# Altium PCB balance_car.PcbDoc (part 1 of 4)
Units mil, origin at the board's own origin, x right, y up, seen from the top; angles counter-clockwise.
Board outline 5041 x 1892 mil, 2 copper layers (Top Layer, Bottom Layer); 151 components, 112 nets, 599 pads, 108 vias.
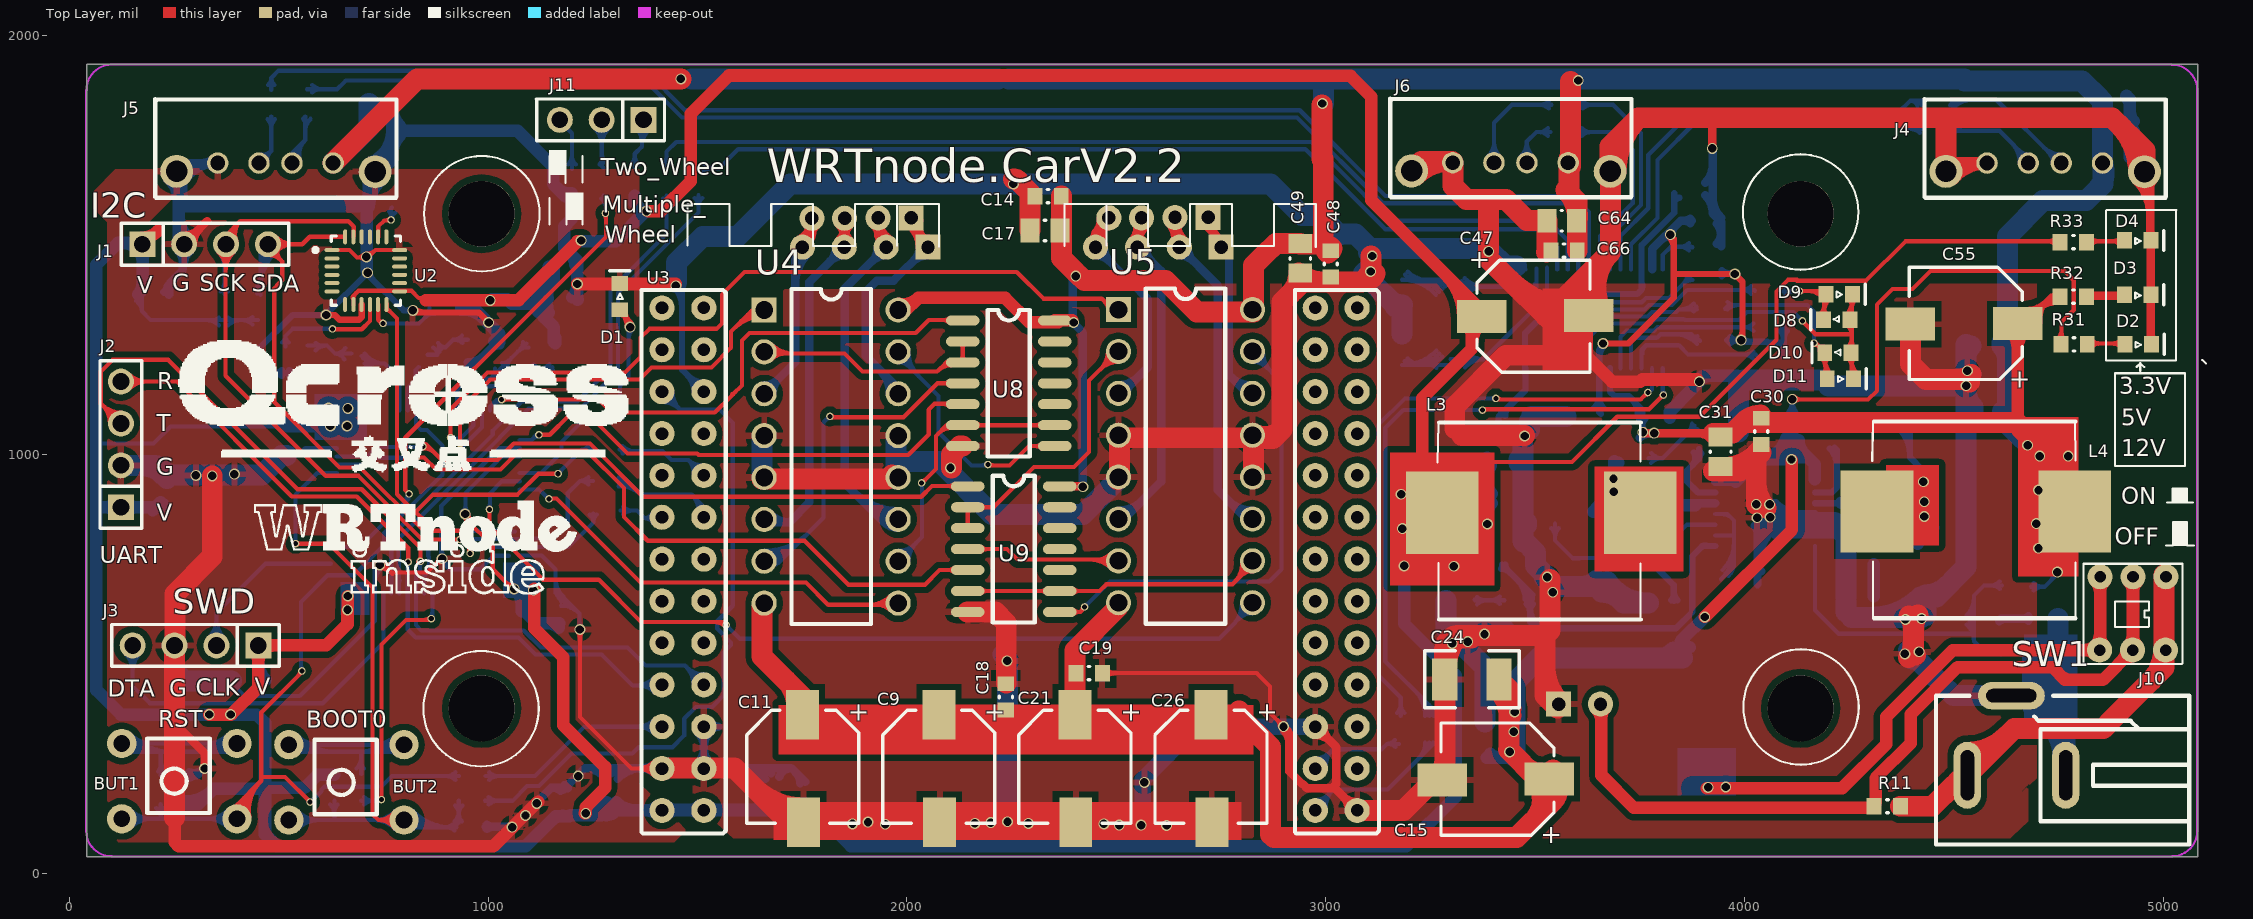
[diagram p0: Top Layer view]
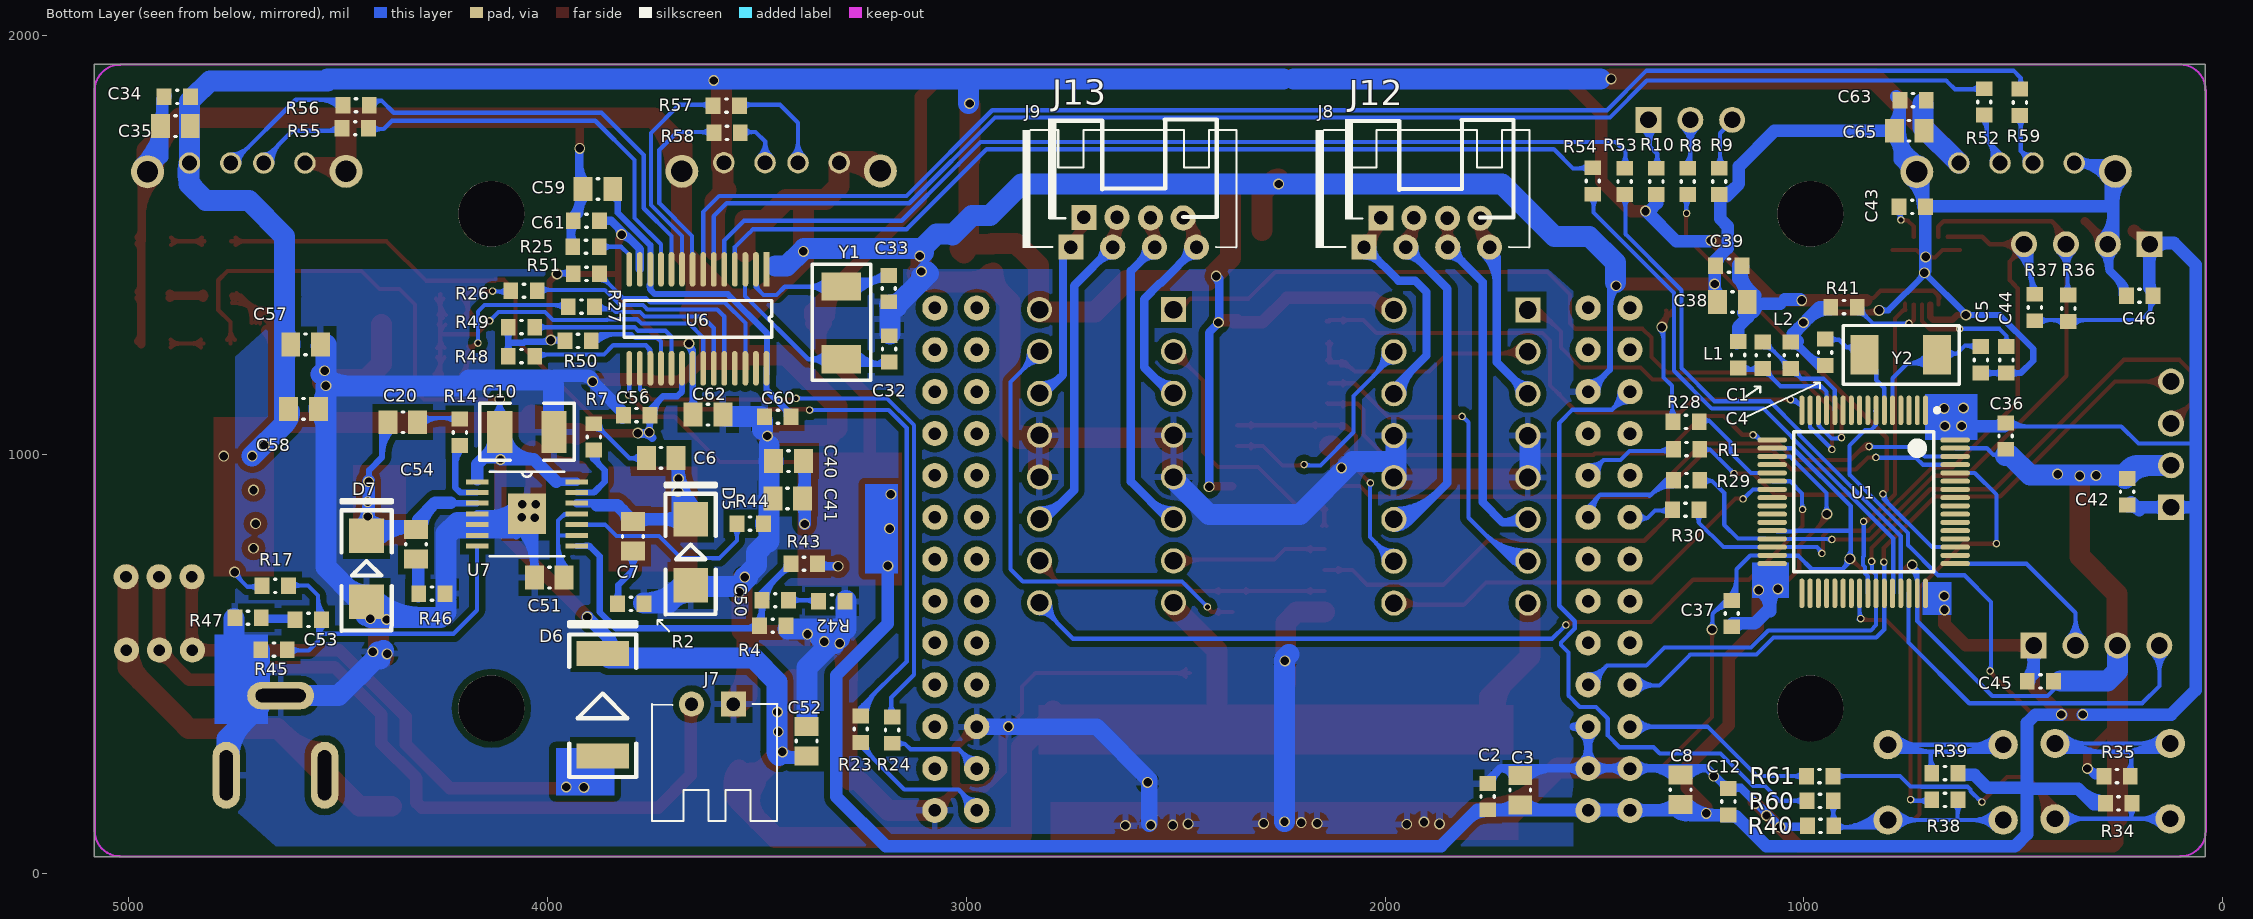
[diagram p1: Bottom Layer view, seen from below]

## Layer stack, top to bottom
Top Layer: signal copper 1.4
Dielectric: core 12.6, FR-4, Dk 4.8
Bottom Layer: signal copper 1.4

## Board outline
5017,1932 41,1932 41,40 5082,40 5082,1931 5081,1932 5018,1932

## Design rules (kind name [scope] priority, off if disabled: settings)
Clearance [All] p1: gap=7
HoleSize [All] p1: absolutevalues=TRUE maxlimit=160 minlimit=12 maxpercent=80.000 minpercent=20.000
MinimumSolderMaskSliver [All] p1: minsoldermaskwidth=3
PasteMaskExpansion [All] p1: expansion=2
PlaneClearance [All] p1: clearance=15
PlaneConnect [All] p1: planeconnectstyle=Relief reliefexpansion=12 reliefentries=4 reliefconductorwidth=12 reliefairgap=12
PolygonConnect [All] p1: connectstyle=Relief reliefconductorwidth=15 reliefentries=4 polygonreliefangle="90 Angle"
RoutingVias [All] p1: holewidth=15 width=25 viastyle="Through Hole" minholewidth=12 minwidth=18 maxholewidth=35 maxwidth=41
SilkToSilkClearance [All] p1: silktosilkclearance=6
SilkscreenOverComponentPads [All] p1: minsilkscreentomaskgap=7
SolderMaskExpansion [All] p1: expansion=2
Width [All] p1: maxlimit=50 minlimit=1 preferedwidth=10
21 further rules are at their usual default settings.

## Classes and differential pairs
component class "balance car": R1 R29 R30 R60 R61
component class P1: C6 C7 C10 C15 C20 C24 C40 C41 C47 C50 C51 C52 C53 C54 C55 C57 C58 D2 D3 D4 D5 D6 D7 J7 J10 L3 L4 R2 R4 R7 R11 R14 R17 R31 R32 R33 R42 R43 R44 R45 R46 R47 SW1 U7
component class P2: BUT1 BUT2 C1 C2 C3 C4 C5 C36 C37 C45 C46 D1 J1 J2 J3 J11 L1 L2 R8 R9 R10 R28 R34 R35 R38 R39 R40 U1 Y2
component class P3: C8 C12 U3
component class P4: C38 C39 C42 C43 C44 R36 R37 R41 U2
component class P6: C30 C31 C32 C33 C34 C35 C56 C59 C60 C61 C62 C63 C64 C65 C66 D8 D9 D10 D11 J4 J5 J6 R23 R24 R25 R26 R27 R48 R49 R50 R51 R52 R53 R54 R55 R56 R57 R58 R59 U6 Y1
component class P5: C9 C11 C13 C14 C16 C17 C18 C19 C21 C22 C23 C25 C26 C27 C28 C29 C48 C49 D12 D13 D14 D15 D16 D17 D18 D19 D20 D21 D22 D23 D24 D25 D26 D27 J8 J9 J12 J13 R3 R5 R6 R12 R13 R15 R16 R18 R19 R20 R21 R22 U4 U5 U8 U9

## Components (designator, comment, footprint, x,y, rotation, side; value= is the part's Value field where it differs from the comment)
BUT1 "BUT" AN66 250,220 r90 top
BUT2 "BUT" AN66 649,217 r90 top
C1 "C0603N" C0603N 1095,1246 r270 bottom
C2 "C0603N" C0603N 1752,192 r270 bottom
C3 "C0805N" C0805N 1671,194 r270 bottom
C4 "C0603N" C0603N 946,1253 r270 bottom
C5 "C0603N" C0603N 574,1235 r270 bottom
C6 "C0805N" C0805N 3724,998 r180 bottom
C7 "C0805N" C0805N 3802,809 r90 bottom
C8 "C0805N" C0805N 1288,195 r270 bottom
C9 "100uF/25V" 16V220UF 2075,250 r0 top
C10 "C1210" C1210 4049,1054 r0 bottom
C11 "100uF/25V" 16V220UF 1750,250 r0 top
C12 "C0603N" C0603N 1177,180 r270 bottom
C14 "C0603N" C0603N 2346,1614 r180 top
C15 "T494D107(1)016A(2)" 16V220UF 3406,226 r270 top
C17 "C0603N" C0805N 2333.87,1541 r0 top
C18 "C0603N" C0603N 2239,430 r270 top
C19 "C0603N" C0603N 2444,475 r180 top
C20 "C0805N" C0805N 4341,1083 r180 bottom
C21 "100uF/25V" 16V220UF 2400,250 r0 top
C24 "C1210" C1210 3349,463 r180 top
C26 "100uF/25V" 16V220UF 2725,250 r0 top
C30 "C0603N" C0603N 4037,1046 r90 top
C31 "C0805N" C0805N 3937,1011 r90 top
C32 "C0603N" C0603N 3187,1243 r90 bottom
C33 "C0603N" C0603N 3182,1405 r270 bottom
C34 "C0603N" C0603N 4893,1857 r180 bottom
C35 "C0805N" C0805N 4884,1790 r180 bottom
C36 "C0603N" C0603N 521,1035 r90 bottom
C37 "C0603N" C0603N 1169,629 r270 bottom
C38 "C0805N" C0805N 1166,1370 r180 bottom
C39 "C0603N" C0603N 1188,1454 r180 bottom
C40 "C0805N" C0805N 3420,990 r180 bottom
C41 "C0805N" C0805N 3422,901 r180 bottom
C42 "C0603N" C0603N 225,920 r270 bottom
C43 "C0603N" C0603N 750,1594 r180 bottom
C44 "C0603N" C0603N 519,1217 r90 bottom
C45 "C0603N" C0603N 426,455 r0 bottom
C46 "C0603N" C0603N 207,1382 r180 bottom
C47 "6TPB150M" 16V220UF 3500,1329 r90 top
C48 "C0603N" C0603N 3009,1446 r90 top
C49 "C0805N" C0805N 2933,1472.87 r90 top
C50 "C0603N" C0603N 3447,649 r0 bottom
C51 "C0805N" C0805N 3991,712 r180 bottom
C52 "C0805N" C0805N 3375,311 r270 bottom
C53 "C0603N" C0603N 4580,608 r180 bottom
C54 "C0805N" C0805N 4320,790 r90 bottom
C55 "T494D686(1)016A(2)" 16V220UF 4524,1314 r270 top
C56 "C0603N" C0603N 3796,1097 r180 bottom
C57 "C0805N" C0805N 4582,1257 r0 bottom
C58 "C0805N" C0805N 4587,1103 r0 bottom
C59 "C0805N" C0805N 3884,1628 r0 bottom
C60 "C0603N" C0603N 3459,1093 r180 bottom
C61 "C0603N" C0603N 3898,1555 r0 bottom
C62 "C0805N" C0805N 3621,1089 r0 bottom
C63 "C0603N" C0603N 748,1849 r180 bottom
C64 "C0805N" C0805N 3568,1564 r0 top
C65 "C0805N" C0805N 744,1779 r180 bottom
C66 "C0603N" C0603N 3560,1490 r0 top
D1 "LED0603" LED0603 1314,1375 r90 top
D2 "LED0603" LED0603 4938,1263 r0 top
D3 "LED0603" LED0603 4937,1381 r0 top
D4 "LED0603" LED0603 4937,1511 r0 top
D5 "MBRA340" 403D_02 3658,765 r90 bottom
D6 "SS36" DO-214AB 3868,280 r90 bottom
D7 "B240A" 403D_02 4432,726 r90 bottom
D8 "LED0603" LED0603 4222,1322 r180 top
D9 "LED0603" LED0603 4224,1383 r0 top
D10 "LED0603" LED0603 4225,1243 r180 top
D11 "LED0603" LED0603 4227,1181 r0 top
J1 "SIP4" SIP4-2.54 175,1500 r0 top
J2 "SIP4" SIP4-2.54 125,875 r90 top
J3 "SIP4" SIP4-2.54 450,546 r180 top
J4 "USB_SOCKET" USB-A-90-L 4725,1700 r180 top
J5 "USB_SOCKET" USB-A-90-L 500,1700 r180 top
J6 "USB_SOCKET" USB-A-90-L 3449,1701 r180 top
J7 "TJC3-2A" TJC3-2A 3606,404 r0 bottom
J8 "TJC3-4A" TJC3-4A 1900,1625 r0 bottom
J9 "TJC3-4A" TJC3-4A 2600,1625 r0 bottom
J10 "head_power" DC2.1 4675,250 r0 top
J11 "SIP3" SIP3 1275,1800 r180 top
J12 "TJC3-4A" PH4.0-L 1866,1666 r0 bottom
J13 "TJC3-4A" PH4.0-L 2575,1667 r0 bottom
L1 "L0603N" R0603N 1159,1240 r270 bottom
L2 "L0603N" R0603N 1029,1235 r90 bottom
L3 "QiaoTian12_12_7" CDRH127 3521,866 r270 top
L4 "QiaoTian12_12_7" CDRH127 4559,869 r270 top
R1 "R0603" R0603N 1282,1011 r180 bottom
R2 "R0603N" R0603N 3799,645 r0 bottom
R4 "R0603N" R0603N 3460,593 r0 bottom
R7 "R0603N" R0603N 3887,1040 r90 bottom
R8 "R0603N" R0603N 1275,1650 r90 bottom
R9 "R0603N" R0603N 1200,1650 r90 bottom
R10 "R0603N" R0603N 1350,1650 r90 bottom
R11 "R0603N" R0603N 4339,158 r0 top
R14 "R0603N" R0603N 4211,1055 r270 bottom
R17 "R0603N" R0603N 4652,684 r180 bottom
R23 "R0603N" R0603N 3254,346 r270 bottom
R24 "R0603N" R0603N 3179,344 r270 bottom
R25 "R0603N" R0603N 3910,1494 r180 bottom
R26 "R0603N" R0603N 4058,1389 r180 bottom
R27 "R0603N" R0603N 3921,1351 r180 bottom
R28 "R0603N" R0603N 1283,1076 r180 bottom
R29 "R0603" R0603N 1282,937 r180 bottom
R30 "R0603" R0603N 1284,866 r180 bottom
R31 "R0603N" R0603N 4789,1265 r180 top
R32 "R0603N" R0603N 4787,1379 r180 top
R33 "R0603N" R0603N 4787,1509 r180 top
R34 "R0603N" R0603N 250,165 r180 bottom
R35 "R0603N" R0603N 250,234 r0 bottom
R36 "R0603N" R0603N 370,1351 r270 bottom
R37 "R0603N" R0603N 450,1353 r270 bottom
R38 "R0603N" R0603N 665,173 r180 bottom
R39 "R0603N" R0603N 665,237 r180 bottom
R40 "R0603N" R0603N 962,111 r180 bottom
R41 "R0603N" R0603N 906,1350 r180 bottom
R42 "R0603N" R0603N 3319,651 r0 bottom
R43 "R0603N" R0603N 3389,737 r180 bottom
R44 "R0603N" R0603N 3518,833 r180 bottom
R45 "R0603N" R0603N 4655,532 r180 bottom
R46 "R0603N" R0603N 4274,670 r0 bottom
R47 "R0603N" R0603N 4717,608 r180 bottom
R48 "R0603N" R0603N 4060,1237 r0 bottom
R49 "R0603N" R0603N 4060,1306 r0 bottom
R50 "R0603N" R0603N 3925,1273 r0 bottom
R51 "R0603N" R0603N 3905,1433 r0 bottom
R52 "R0603N" R0603N 567,1840 r90 bottom
R53 "R0603N" R0603N 1426,1650 r90 bottom
R54 "R0603N" R0603N 1502,1651 r90 bottom
R55 "R0603N" R0603N 4461,1777 r180 bottom
R56 "R0603N" R0603N 4459,1832 r180 bottom
R57 "R0603N" R0603N 3571,1835 r0 bottom
R58 "R0603N" R0603N 3569,1770 r0 bottom
R59 "R0603N" R0603N 482,1839 r90 bottom
R60 "R0603" R0603N 963,171 r180 bottom
R61 "R0603" R0603N 964,230 r180 bottom
SW1 "TOGGLE SWITCH" KEY-ONOFF 4930,647 r180 top
U1 "STM32F103R8T6" LQFP64_N 857,887 r270 bottom
U2 "MPU6050" MPU6050 627,1488 r0 top
U3 "WRTnode_MainBoard" WRTNODE_MAINBOARD_DIP26*2 3075,1350 r0 top
U4 "L293D" DIP16 1659,1345 r0 top
U5 "L293D" DIP16 2505,1346 r0 top
U6 "FE1.1S" SSOP28 3477,1442 r270 bottom
U7 "TPS54386_PWP_14" PWP14_2P31X2P46- 4049,858 r180 bottom
U8 "74HC04" SOP14 2243,1195 r270 top
U9 "74HC04" SOP14 2255,799 r270 top
Y1 "12MHz" XTAL_5032_2 3298,1314 r90 bottom
Y2 "8MHz" XTAL_5032_2 769,1238 r180 bottom
? "Comment" LOGO_WRT 806,788 r0 top
? "Comment" "LOGO - DUPLICATE" 743,1104 r0 top

## Footprints (in the part's own frame and the unit in brackets; to place one, negate y for a bottom-side part, rotate by r counter-clockwise, add the part's x,y. Pads: shape width x height; smd on the part's side, far side on the other; paste and mask are expansions set on the pad)
16V220UF [mil]
  rect 78.74x118.11 smd: 1(1,128) 2(3,-128)
  silkscreen extent -133,-131 135,139, body extent -115,-120 125,120, height 150
403D_02 [mm]
  rect 2.1x2.1 smd: 1(-1.966,0) 2(2.034,0)
  silkscreen extent -3.73,-1.52 4.19,1.52, body extent -2.55,-1.5 2.65,1.4, height 2.1
AN66 [mil]
  round 70 hole 40: 1(-90,125) 1(-90,-150) 2(90,125) 2(90,-150)
  silkscreen extent -76,-85 102,64, body extent -114,-164 118,140, height 118
C0603N [mm]
  rect 0.9x1 smd: 1(-0.571,-0.076) 2(1.029,-0.076)
  silkscreen extent 0.18,-0.48 0.28,0.32, body extent -0.65,-0.55 1.1,0.4, height 0.55
C0805N [mm]
  rect 1.15x1.45 smd: 1(-1.013,-0.152) 2(0.787,-0.152)
  silkscreen extent -0.16,-0.78 -0.06,0.47, body extent -1.21,-0.88 0.99,0.57, height 0.75
C1210 [mil]
  rect 60x100 smd: 1(-65,0) 2(65,0)
  silkscreen extent -113,-68 113,68, body extent -81,-53 84,53, height 45
CDRH127 [mm]
  rect 5x4.4 smd: 1(0.13,5.836) 2(0.13,-6.164)
  silkscreen extent -5.38,-6.45 6.63,5.87, body extent -5.44,-6.43 6.56,5.77, height 8.4
DC2.1 [mil]
  oval 65x160 hole 32 slot 120 at 90 deg: 1(-143,-16) 3(92,-16)
  oval 160x65 hole 32 slot 120 at 0 deg: 2(-38,174)
  silkscreen extent -218,-181 387,174
DIP16 [mil]
  rect 60x60 hole 42: 1(0,0)
  round 60 hole 42: 2(0,-100) 3(0,-200) 4(0,-300) 5(0,-400) 6(0,-500) 7(0,-600) 8(0,-700) 9(320,-700) 10(320,-600) 11(320,-500) 12(320,-400) 13(320,-300) 14(320,-200) 15(320,-100) 16(320,0)
  silkscreen extent 65,-750 255,50, body extent 36,-744 322,48, height 50
DO-214AB [mm]
  rect 1.52x3.2 smd: 1(0,0) 2(6.21,0)
  silkscreen extent -1.27,-2.03 8.13,2.03, body extent -0.81,-2.82 6.98,3.08, height 2.4
KEY-ONOFF [mil]
  round 60 hole 27.56: 1(-76.37,-61) 1(-75.37,114) 2(2.37,-61) 2(3.37,114) 3(81.11,-61) 3(82.11,114)
  silkscreen extent -116,-92 121,147, body extent -114,-90 120,145, height 354
LED0603 [mm]
  rect 0.9x1 smd: 1(-0.749,0) 2(0.851,0)
  silkscreen extent -0.1,-0.61 1.63,0.61, body extent -0.82,-0.48 0.93,0.47, height 0.55
"LOGO - DUPLICATE" [mil]
  silkscreen extent -483,-145 591,167
LOGO_WRT [mil]
  silkscreen extent -365,-121 405,101
LQFP64_N [mm] "Thin QFP, 64-Leads, Body 10x10mm, Pitch 0.5mm, IPC Medium Density"
  oval 1.8x0.3 smd: 1(-5.55,3.75) 2(-5.55,3.25) 3(-5.55,2.75) 4(-5.55,2.25) 5(-5.55,1.75) 6(-5.55,1.25) 7(-5.55,0.75) 8(-5.55,0.25) 9(-5.55,-0.25) 10(-5.55,-0.75) 11(-5.55,-1.25) 12(-5.55,-1.75) 13(-5.55,-2.25) 14(-5.55,-2.75) 15(-5.55,-3.25) 16(-5.55,-3.75) 33(5.55,-3.75) 34(5.55,-3.25) 35(5.55,-2.75) 36(5.55,-2.25) 37(5.55,-1.75) 38(5.55,-1.25) 39(5.55,-0.75) 40(5.55,-0.25) 41(5.55,0.25) 42(5.55,0.75) 43(5.55,1.25) 44(5.55,1.75) 45(5.55,2.25) 46(5.55,2.75) 47(5.55,3.25) 48(5.55,3.75)
  oval 0.3x1.8 smd: 17(-3.75,-5.55) 18(-3.25,-5.55) 19(-2.75,-5.55) 20(-2.25,-5.55) 21(-1.75,-5.55) 22(-1.25,-5.55) 23(-0.75,-5.55) 24(-0.25,-5.55) 25(0.25,-5.55) 26(0.75,-5.55) 27(1.25,-5.55) 28(1.75,-5.55) 29(2.25,-5.55) 30(2.75,-5.55) 31(3.25,-5.55) 32(3.75,-5.55) 49(3.75,5.55) 50(3.25,5.55) 51(2.75,5.55) 52(2.25,5.55) 53(1.75,5.55) 54(1.25,5.55) 55(0.75,5.55) 56(0.25,5.55) 57(-0.25,5.55) 58(-0.75,5.55) 59(-1.25,5.55) 60(-1.75,5.55) 61(-2.25,5.55) 62(-2.75,5.55) 63(-3.25,5.55) 64(-3.75,5.55)
  silkscreen extent -5.67,-4.25 4.25,4.57, body extent -5,-5 5,5, height 1.6
MPU6050 [mm]
  oval 0.9x0.25 smd: 1(0,0) 2(0,-0.5) 3(0,-1) 4(0,-1.5) 5(0,-2) 6(0,-2.5) 13(4.1,-2.5) 14(4.1,-2) 15(4.1,-1.5) 16(4.1,-1) 17(4.1,-0.5) 18(4.1,0)
  oval 0.25x0.9 smd: 7(0.8,-3.3) 8(1.3,-3.3) 9(1.8,-3.3) 10(2.3,-3.3) 11(2.8,-3.3) 12(3.3,-3.3) 19(3.3,0.8) 20(2.8,0.8) 21(2.3,0.8) 22(1.8,0.8) 23(1.3,0.8) 24(0.8,0.8)
  silkscreen extent -1.12,-3.35 4.15,0.85, body extent -0.03,-3.33 4.11,0.81, height 0.76
PH4.0-L [mil]
  rect 60x60 hole 32: 1(144,101)
  round 60 hole 32: 2(65,101) 3(-15,102) 4(-93,102)
  silkscreen extent -173,-135 230,105, body extent -173,-132 214,104, height 181
PWP14_2P31X2P46- [mil]
  rect 54x12 smd: 1(-119,76.77) 2(-119,51.18) 3(-119,25.59) 4(-119,0) 5(-119,-25.59) 6(-119,-51.18) 7(-119,-76.77) 8(119,-76.77) 9(119,-51.18) 10(119,-25.59) 11(119,0) 12(119,25.59) 13(119,51.18) 14(119,76.77)
  rect 90.94x96.85 smd: 15(0,0)
  Top Layer region: 0,-48.43 0,-48.43 0,-48.43 0,-48.43 0,-48.43 0,-48.43 0,-48.43 0,-48.43
  Top Layer region: 0,48.43 0,48.43 0,48.43 0,48.43 0,48.43 0,48.43 0,48.43 0,48.43
  silkscreen extent -89,-101 89,101, body extent -96,-91 96,89, height 30
R0603N [mm]
  rect 0.9x1 smd: 1(-0.749,0.051) 2(0.851,0.051)
  silkscreen extent 0,-0.35 0.1,0.45, body extent -0.8,-0.42 0.9,0.53, height 0.6
SIP3 [mil]
  rect 62x62 hole 40: 1(-96,1)
  round 62 hole 40: 2(4,1) 3(104,1)
  silkscreen extent -146,-49 160,51
SIP4-2.54 [mil]
  rect 62x62 hole 40: 1(-1,2)
  round 62 hole 40: 2(99,2) 3(199,2) 4(299,2)
  silkscreen extent -51,-48 349,52, body extent -50,-48 348,51, height 217
SOP14 [mil]
  oval 24x80 smd: 1(-125,-110) 2(-75,-110) 3(-25,-110) 4(25,-110) 5(75,-110) 6(125,-110) 7(175,-110) 8(175,110) 9(125,110) 10(75,110) 11(25,110) 12(-25,110) 13(-75,110) 14(-125,110)
  silkscreen extent -150,-50 200,50, body extent -147,-96 199,103, height 59
SSOP28 [mm]
  rect 2.1x0.35 smd: 1(0,0)
  oval 2.1x0.35 smd: 2(0,-0.64) 3(0,-1.28) 4(0,-1.92) 5(0,-2.56) 6(0,-3.2) 7(0,-3.84) 8(0,-4.48) 9(0,-5.12) 10(0,-5.76) 11(0,-6.4) 12(0,-7.04) 13(0,-7.68) 14(0,-8.32) 15(6,-8.32) 16(6,-7.68) 17(6,-7.04) 18(6,-6.4) 19(6,-5.76) 20(6,-5.12) 21(6,-4.48) 22(6,-3.84) 23(6,-3.2) 24(6,-2.56) 25(6,-1.92) 26(6,-1.28) 27(6,-0.64) 28(6,0)
  silkscreen extent 1.89,-8.64 4.12,0.32, body extent 0.89,-8.76 5.08,0.38, height 0.76
TJC3-2A [mil]
  rect 60x60 hole 32: 1(-50,0)
  round 60 hole 32: 2(50,0)
  silkscreen extent -155,0 144,279, body extent -117,-32 115,267, height 189
TJC3-4A [mil]
  rect 60x60 hole 32: 1(150.28,130)
  round 60 hole 32: 2(50.28,130) 3(-49.72,130) 4(-149.72,130)
  silkscreen extent -245,-150 266,132, body extent -225,-125 242,175, height 213
USB-A-90-L [mm]
  round 1.3 hole 0.9: 1(-3.297,0.107) 2(-0.797,0.107) 3(1.203,0.107) 4(3.703,0.107)
  round 2 hole 1.3: 5(-5.842,0.635) 6(6.198,0.61)
  silkscreen extent -7.14,-3.78 7.49,2.21, body extent -7.35,-4.29 7.71,2.71, height 14.5
WRTNODE_MAINBOARD_DIP26*2 [mil]
  round 60 hole 30: 1(0,0) 2(0,-100) 3(0,-200) 4(0,-300) 5(0,-400) 6(0,-500) 7(0,-600) 8(0,-700) 9(0,-800) 10(0,-900) 11(0,-1000) 12(0,-1100) 13(0,-1200) 14(-100,0) 15(-100,-100) 16(-100,-200) 17(-100,-300) 18(-100,-400) 19(-100,-500) 20(-100,-600) 21(-100,-700) 22(-100,-800) 23(-100,-900) 24(-100,-1000) 25(-100,-1100) 26(-100,-1200) 27(-1560,0) 28(-1560,-100) 29(-1560,-200) 30(-1560,-300) 31(-1560,-400) 32(-1560,-500) 33(-1560,-600) 34(-1560,-700) 35(-1560,-800) 36(-1560,-900) 37(-1560,-1000) 38(-1560,-1100) 39(-1560,-1200) 40(-1660,0) 41(-1660,-100) 42(-1660,-200) 43(-1660,-300) 44(-1660,-400) 45(-1660,-500) 46(-1660,-600) 47(-1660,-700) 48(-1660,-800) 49(-1660,-900) 50(-1660,-1000) 51(-1660,-1100) 52(-1660,-1200)
  silkscreen extent -1709,-1255 52,248, body extent -1712,-1263 47,50, height 335
XTAL_5032_2 [mm]
  rect 1.7x2.4 smd: 1(-2.2,0) 2(2.2,0)
  silkscreen extent -3.48,-1.78 3.56,1.78, body extent -2.5,-1.48 2.5,1.52, height 1.5

## Part data
C1 C2 C3 C4 C5 C6 C7 C10 C14 C17 C18 C19 C20 C24 C30 C31 C32 C33 C34 C35 C36 C37 C38 C39 C40 C41 C42 C43 C44 C45 C46 C48 C49 C50 C51 C52 C53 C54 C56 C57 C58 C59 C60 C61 C62 C63 C64 C65 C66: library part "Cap Semi", "Capacitor (Semiconductor SIM Model)"
C8 C12: library part Cap, "Capacitor"
C9 C11 C15 C21 C26 C47 C55: library part "Cap Pol3", "Polarized Capacitor (Surface Mount)"
D1 D2 D3 D4 D8 D9 D10 D11: library part LED, "LED"
D5 D6 D7: library part Diode, "Default Diode"
J1 J2 J3: "jointbar"
J4 J5 J6: "USB_TYPEA_SOCKET"
L1 L2: library part Inductor, "Inductor"
L3 L4: library part "Inductor Iron", "Magnetic-Core Inductor"
R1 R2 R4 R7 R8 R9 R10 R11 R14 R17 R23 R24 R25 R26 R27 R28 R29 R30 R31 R32 R33 R34 R35 R36 R37 R38 R39 R40 R41 R42 R43 R44 R45 R46 R47 R48 R49 R50 R51 R52 R53 R54 R55 R56 R57 R58 R59 R60 R61: library part "Res Semi", "Semiconductor Resistor"
U7: "Imported"
Y1 Y2: library part XTAL, "Crystal Oscillator"

## Free pads (board coordinates)
  round 18 hole 12: 0(1568,593) 1(1816,1091) 2(2035,932) 3(809,743) 3(2193,976) 4(838,745) 4(2424,636) 5(575,170) 5(857,840) 6(1003,869) 6(1167,954) 7(768,1560) 8(628,1300) 9(749,1313) 10(828,993) 11(844,1019) 12(910,1040) 13(933,1012) 14(1032,1131) 15(1121,1047) 17(1145,894) 23(555,483) 25(745,176) 27(864,608) 28(933,797) 29(957,764) 30(811,906) 31(1280,1576) 32(3406,1134) 34(3806,1142) 35(3769,1148) 36(3374,1106) 37(4166,1266) 38(4131,1390) 39(4138,1319) 40(540,787)
  round 157.48 hole 157.48: ""(984.25,393.7) ""(984.25,1574.8) ""(4133.86,393.7) ""(4133.86,1574.8)

## Via types
v1: diameter 26, hole 20, Top Layer to Bottom Layer, tented both sides, 108 vias

## Nets (pads, with @x,y where several pads share a name; then routed paths per layer and width w, separated by ;. In a path a pad name is that pad's centre, name@x,y a point inside that pad or via, vN(x,y) a via of type N, cw(c..) or ccw(c..) an arc to the next point about the centre after c; other vN are vias at no path point)
1-1Y: J8.4 J12.4 U4.3 | length 828.7
  Top Layer w20: J8.4@1741.36,1512.9 ccw(c1715.93,1564) J12.4@1773,1564 1773,1524 ; J8.4@1748,1499 1773,1524 ; J8.4@1750.28,1495 ccw(c1732,1531.7) 1773,1531.7 ; J12.4@1761,1548 cw(c1743,1524) 1773,1524 ; J12.4@1785,1548 ccw(c1803,1524) 1773,1524
  Bottom Layer w20: U4.3@1654,1141 1733,1220 1733,1471 J8.4@1747,1485 ; U4.3@1659,1165 ccw(c1659,1210.87) 1691.44,1178.44 ; U4.3@1679,1145 cw(c1729.7,1145) 1693.85,1180.85 ; 1733,1405.01 cw(c1840.26,1405.01) J8.4@1764.42,1480.86 ; 1733,1453.3 cw(c1791.98,1453.3) J8.4@1750.28,1495
1-2Y: J8.3 J12.3 U4.6 | length 1144.9
  Top Layer w20: J8.3@1836.13,1509.14 ccw(c1800.24,1545.04) J12.3@1851,1545.04 ; J12.3@1836.86,1549.86 cw(c1802.72,1515.72) 1851,1515.72 cw(c1899.28,1515.72) J12.3@1865.14,1549.86 ; J8.3@1844,1494 1851,1501 J12.3@1851,1564 ; J12.3@1851,1541.53 ccw(c1896.81,1541.53) J8.3@1864.42,1509.14
  Bottom Layer w20: U4.6@1663,838 1719,838 ; U4.6@1673.14,830.86 cw(c1690.38,813.62) 1690.38,838 ; U4.6@1673.97,858.26 ccw(c1719,898.16) 1719,838 ; J8.3@1830.27,1495 cw(c1781.99,1495) 1816.13,1460.86 cw(c1850.28,1426.72) J8.3@1850.28,1475 ; J8.3@1847,1494 J8.3@1848.14,1492.86 ; J8.3@1850.28,1495 J8.3@1848.14,1492.86 ; J8.3@1852,1489 J8.3@1848.14,1492.86 ; 1719,838 1767,886 1767,1411.73 J8.3@1848.14,1492.86
1-3Y: J8.2 J12.2 U4.11 | length 1399.5
  Top Layer w20: 1931,1529.35 ccw(c1971.25,1529.35) J8.2@1950.28,1495 ; J8.2@1957,1500 1931,1526 ; J8.2@1960.7,1512.07 cw(c1993.01,1565) J12.2@1931,1565 1931,1526 ; 1931,1526 cw(c1959.02,1526) 1942.67,1548.76 ccw(c1959.02,1526) 1931,1526 ; 1931,1526 ccw(c1902.98,1526) 1919.33,1548.76 cw(c1902.98,1526) 1931,1526
  Bottom Layer w20: 1874.87,908.13 ccw(c1979,1012.27) U4.11@1979,865 ; 1909.01,873.99 ccw(c1979,943.98) U4.11@1979,845 ; J8.2@1930.27,1495 cw(c1881.99,1495) 1916.13,1460.86 cw(c1950.28,1426.72) J8.2@1950.28,1475 ; 1943.15,839.85 ccw(c1979,875.7) U4.11@1979,825 ; J8.2@1950.28,1495 1851,1395.73 1851,932 1943,840 ; U4.11@1960.26,851.99 cw(c1943,858.42) 1943,840 ; U4.11@1964.8,830.92 ccw(c1943,809.3) 1943,840 ; U4.11@1966,840 1943,840
1-4Y: J8.1 J12.1 U4.14 | length 801.5
  Top Layer w20: J12.1@2009.96,1544.04 cw(c1960.93,1495) J8.1@2030.28,1495 ; J12.1@2010,1565 2010,1544 J8.1@2052,1502 ; J12.1@2029.24,1559.55 ccw(c2075.47,1546.47) J8.1@2041.5,1512.5 ; J8.1@2031.03,1522.97 ccw(c2050.28,1542.22) J8.1@2050.28,1515
  Bottom Layer w20: 1935.67,1201.33 cw(c1879.33,1145) U4.14@1959,1145 ; U4.14@1974,1141 1974,1163 1901,1236 1901,1388 1928,1415 1968,1415 J8.1@2039,1486 ; 2012.25,1459.25 cw(c2050.28,1421.23) J8.1@2050.28,1475 ; 2017.74,1464.74 ccw(c1987.48,1495) J8.1@2030.27,1495
2-1Y: J9.4 J13.4 U5.3 | length 890.1
  Top Layer w20: J9.4@2440.01,1512.16 ccw(c2429.17,1530.27) 2450.28,1530.27 ; J9.4@2449,1496 J9.4@2449,1501 ; 2451.78,1531.78 ccw(c2425.93,1557.62) J13.4@2462.17,1562.39 ; 2452.98,1532.98 cw(c2482,1503.96) J13.4@2482,1545 ; 2458.92,1538.92 ccw(c2487.33,1510.52) J9.4@2450.28,1495 2450.28,1530.27 ; J9.4@2460.54,1512.16 cw(c2471.38,1530.27) 2450.27,1530.27 ; J9.4@2468.72,1502.73 cw(c2517.04,1522.96) 2480,1560 2450.28,1530.27
  Bottom Layer w20: J9.4@2448,1492 J9.4@2448,1493 ; J9.4@2450.28,1475 cw(c2450.28,1426.72) 2484.42,1460.86 cw(c2518.56,1495) J9.4@2470.28,1495 ; J9.4@2450.28,1495 2536.64,1408.64 ; J9.4@2455,1483 J9.4@2456,1484 ; U5.3@2505,1166 ccw(c2505,1233.6) 2552.8,1185.8 ; U5.3@2507,1140 2575,1208 2575,1371 2537,1409 ; U5.3@2525,1146 cw(c2553.97,1146) 2533.49,1166.49
2-2Y: J9.3 J13.3 U5.6 | length 1063.8
  Top Layer w20: J9.3@2536.13,1509.14 ccw(c2501.99,1543.29) 2550.28,1543.29 ccw(c2598.56,1543.29) J9.3@2564.42,1509.14 ; J9.3@2550.28,1494.33 cw(c2629.14,1494.33) J13.3@2573.99,1550.7 ; J9.3@2550.28,1495 2550.28,1547.27 J13.3@2563,1560
  Bottom Layer w20: U5.6@2505,866 ccw(c2505,945.67) 2561.33,889.33 ; U5.6@2513,841 2607,935 2607,1438.28 J9.3@2550.28,1495 ; J9.3@2550.28,1475 cw(c2550.28,1426.72) 2584.42,1460.86 cw(c2618.56,1495) J9.3@2570.28,1495
2-3Y: J9.2 J13.2 U5.11 | length 1100.3
  Top Layer w20: J13.2@2625.86,1551.86 cw(c2591.72,1517.72) 2640,1517.72 cw(c2688.28,1517.72) J13.2@2654.14,1551.86 ; J9.2@2654,1482 2640,1496 J13.2@2640,1566 ccw(c2718.38,1566) J9.2@2664.12,1509.43
  Bottom Layer w20: J9.2@2650.28,1475 cw(c2650.28,1426.72) 2684.42,1460.86 cw(c2718.56,1495) J9.2@2670.28,1495 ; J9.2@2650.28,1495 2742,1403.28 2742,915 U5.11@2822,835 ; 2766.96,890.04 ccw(c2825,948.08) U5.11@2825,866
2-4Y: J9.1 J13.1 U5.14 | length 537.4
  Top Layer w20: J13.1@2719,1566 2719,1542 J9.1@2749,1512 ; J13.1@2734.94,1553.92 ccw(c2753.14,1540.14) J9.1@2737,1524
  Bottom Layer w20: J9.1@2750.28,1495 2769,1476.28 2769,1190 U5.14@2820,1139 ; 2775,1184 ccw(c2818.99,1227.98) U5.14@2823.54,1165.95
BOOT0: BUT2.1 pad.40 R38.2 R40.2 R60.2 U1.60 | length 2677.1
  Top Layer w10: BUT2.1@525,130 BUT2.1@525,155 ; pad.40@540,787 619,787 724,682 724,354 724,141 738,127 ; pad.40@542.83,784.17 cw(c549.66,777.34) 549.66,787 cw(c549.66,796.66) pad.40@542.83,789.83 ; BUT2.1@775.24,108.69 ccw(c738,79.99) 738,127 ; BUT2.1@775.24,145.31 cw(c738,174.01) 738,127 ; BUT2.1@783.16,114.79 ccw(c758.33,95.66) 758.33,127 ccw(c758.33,158.34) BUT2.1@783.16,139.21 ; BUT2.1@806,127 BUT2.1@799,127 738,127
  Bottom Layer w10: BUT2.1@524,127 633,127 ; pad.40@537.17,789.83 ccw(c530.34,796.66) 540,796.66 ccw(c549.66,796.66) pad.40@542.83,789.83 ; BUT2.1@538.14,112.86 cw(c572.28,78.72) 572.28,127 cw(c572.28,175.28) BUT2.1@538.14,141.14 ; pad.40@540,786 540,904 591.9,955.9 U1.60@638.5,955.9 ; BUT2.1@545.21,105.79 cw(c596.43,54.57) 596.43,127 cw(c596.43,199.43) BUT2.1@545.21,148.21 ; R38.2@622.51,164.04 cw(c597.19,138.72) 633,138.72 ; 633,145.94 cw(c658.59,145.94) R38.2@640.5,164.04 ; R38.2@633,173 633,127 ; BUT2.1@777.79,105.79 ccw(c726.57,54.57) 726.57,127 ccw(c726.57,199.43) BUT2.1@777.79,148.21 ; BUT2.1@784.86,112.86 ccw(c750.72,78.72) 750.72,127 ccw(c750.72,175.28) BUT2.1@784.86,141.14 ; BUT2.1@798,128 797,127 633,127 ; BUT2.1@799,127 ccw(c840.04,168.04) 840.04,110 ; BUT2.1@800,110 R40.2@924,110 ; BUT2.1@806.07,134.07 ccw(c864.18,192.18) 864.18,110 ; BUT2.1@813.14,141.14 ccw(c888.33,216.33) 888.33,110 ; BUT2.1@820.21,105.79 cw(c830.38,95.62) 830.38,110 ; BUT2.1@820.21,148.21 ccw(c912.47,240.47) R40.2@912.47,110 ; 895.31,110 ccw(c895.31,144.22) R40.2@919.51,120.02 ; 900.29,110 cw(c900.29,82.82) R40.2@919.51,102.04 ; R40.2@919.51,123.96 ccw(c895.39,148.08) 929.5,148.08 ; R60.2@920.51,162.04 cw(c898.8,140.33) 929.5,140.33 cw(c960.2,140.33) R60.2@938.5,162.04 ; R40.2@924,115 929.5,120.5 R60.2@929.5,173 ; 929.5,143.25 ccw(c956.79,143.25) R40.2@937.5,123.96
DRV: D8.1 D9.2 D10.1 D11.2 pad.39 U6.22 | length 1288.8
  Top Layer w10: pad.39@4138,1318 4169,1287 4254,1287 4256,1285 ; pad.39@4142,1319 ccw(c4154.07,1319) 4145.54,1310.46 ; D8.1@4242.5,1332.96 ccw(c4209.92,1365.54) D9.2@4256,1365.54 ; D8.1@4243.66,1310.01 cw(c4223.89,1284.71) 4256,1284.71 ; D10.1@4245.5,1232.04 cw(c4220.16,1206.7) 4256,1206.7 ; D10.1@4245.5,1253.96 ccw(c4220.16,1279.3) 4256,1279.3 ; D9.2@4248.5,1372.04 cw(c4230.41,1353.94) 4256,1353.94 ; D8.1@4249.58,1325.89 ccw(c4234.06,1341.4) D8.1@4256,1341.4 ; D11.2@4251.5,1191.96 ccw(c4240.65,1202.81) 4256,1202.81 ; D11.2@4256,1186 4256,1285 ; D11.2@4256,1200.38 ccw(c4277.91,1200.38) D11.2@4262.42,1184.89 ; 4256,1213.96 cw(c4281.57,1213.96) D10.1@4263.49,1232.04 ; D10.1@4256,1224.52 ccw(c4302.05,1224.52) D11.2@4269.49,1191.96 ; 4256,1272.04 ccw(c4281.57,1272.04) D10.1@4263.49,1253.96 ; 4256,1300.2 cw(c4271.32,1300.2) D8.1@4260.49,1311.04 ; 4256,1343.8 ccw(c4271.32,1343.8) D8.1@4260.49,1332.96 ; 4256,1346.72 cw(c4291.81,1346.72) D9.2@4266.49,1372.04 ; D9.2@4256,1383 4256,1285
  Bottom Layer w10: U6.22@3628.18,1205.78 3628.18,1279.18 3661.5,1312.5 3775.62,1312.5 3786.12,1323 3855,1323 3857,1321 3987,1321 4006,1340 4117,1340 pad.39@4138,1319 ; pad.39@4134,1319 ccw(c4124.34,1319) 4131.17,1325.83 ccw(c4138,1332.66) pad.39@4138,1323